# EAGLE board AlteraMAX3000ACPLDbreakout-v1 (EAGLE 5.11)
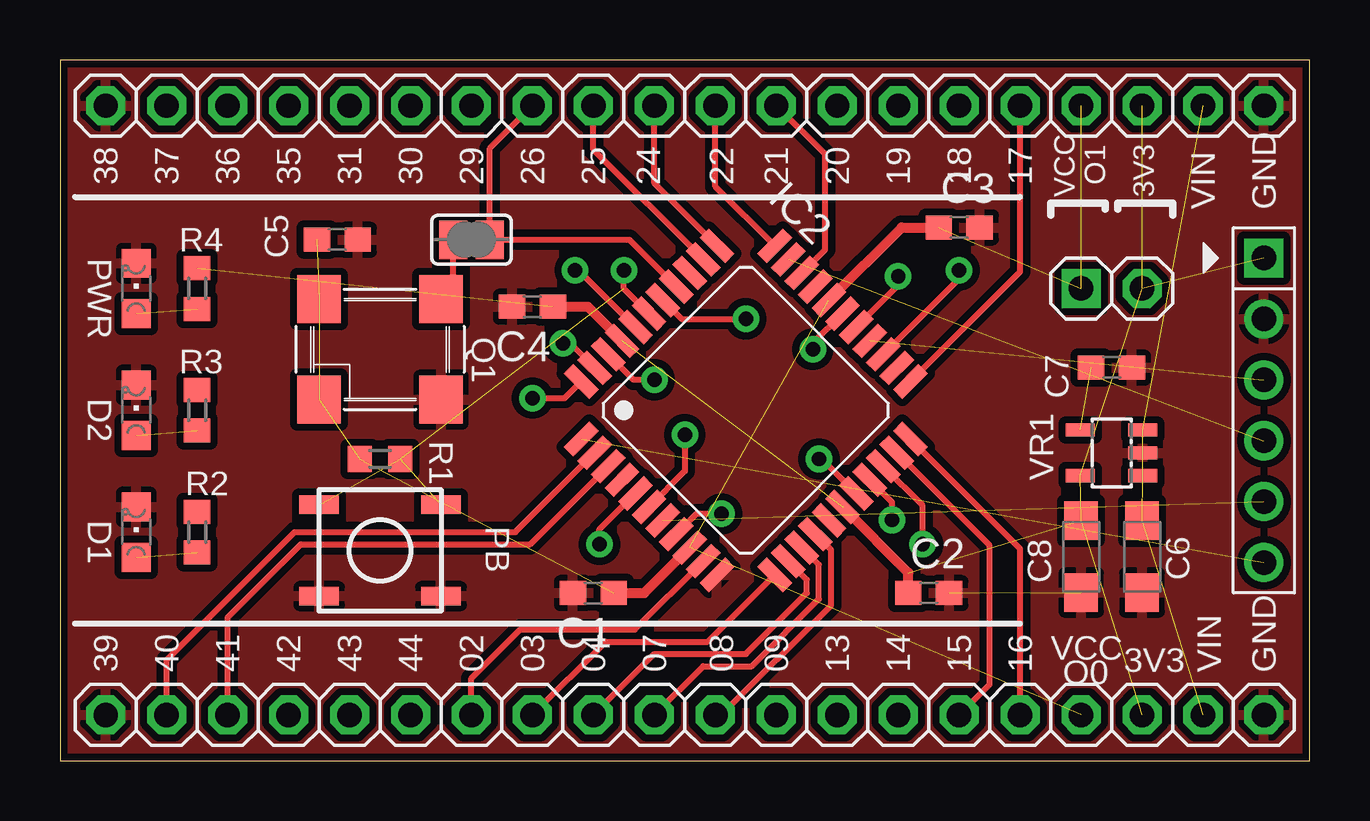
[diagram p0: board, top side]
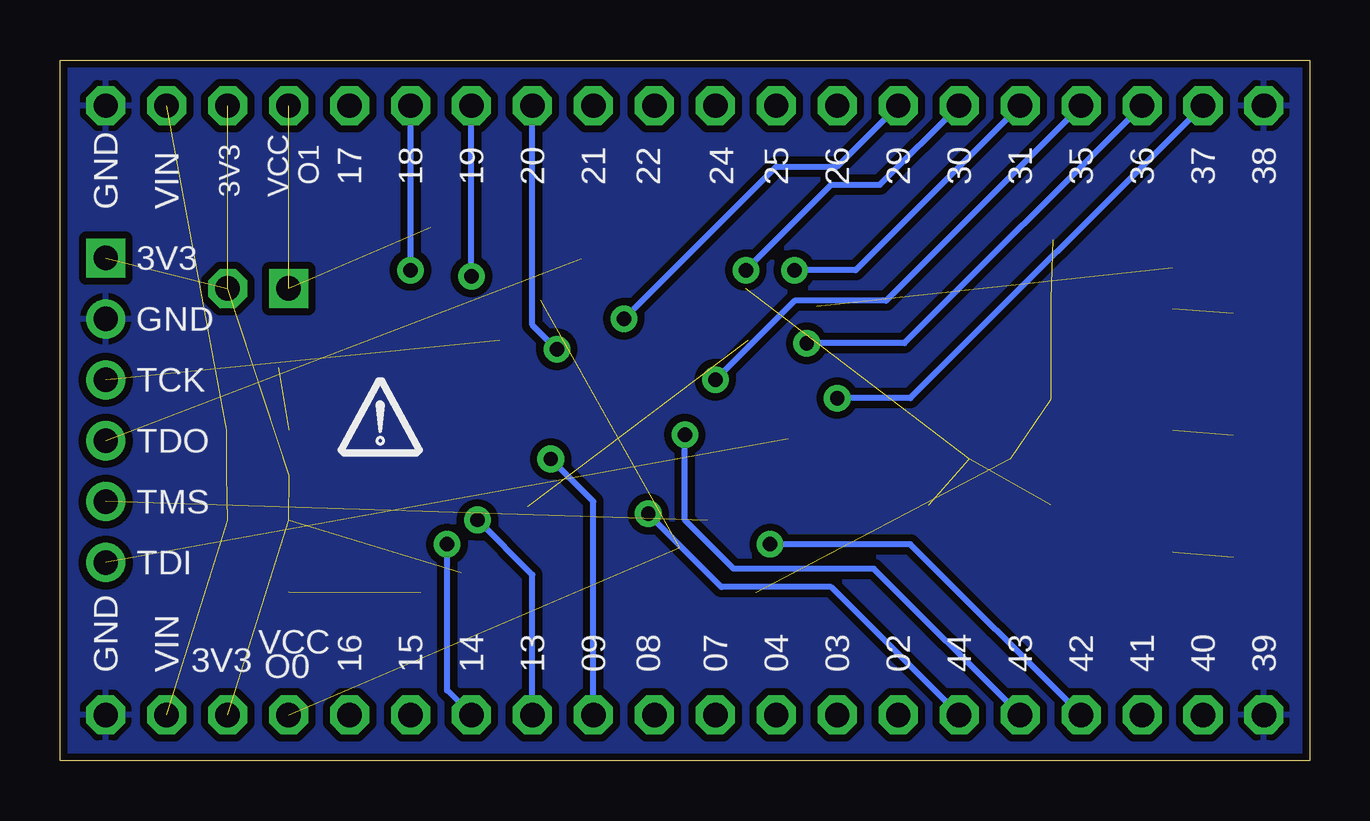
[diagram p1: board, bottom side, seen from below]

Size 52.07 x 29.21 mm. Coordinates in mm from the lower left corner, seen from the top.
Outline: 0,0 52.07,0 52.07,29.21 0,29.21 0,0
Copper layers (1*16): Top 0.035mm / dielectric 1.5mm / Bottom 0.035mm
Design rules "SparkFun": minimum track width 8mil, minimum drill 20mil, track to track 8mil, track to pad 8mil, pad to pad 8mil, via to via 8mil, smd to smd 8mil, copper to edge 10mil, drill to drill 8mil, minimum pad ring 12mil, minimum via ring 10mil, stop-mask expansion 4mil, vias tented up to drill 25mil, thermal gap 10mil

## Footprints (pad centres in the part's own frame; a part is rotated, then mirrored left to right if it is on the bottom)
C603 = smd 1.1 x 1: 1 -0.85,0; 2 0.85,0
SMC_A = smd 1.6 x 1.4: + -1.5,0; - 1.5,0
HEADER_PRG_1X06 = drill 1.016 square: 1 -6.35,0 | drill 1.016 round: 2 -3.81,0; 3 -1.27,0; 4 1.27,0; 5 3.81,0; 6 6.35,0
LED-805 = smd 1.2 x 1.2: A 0,-1.05; C 0,1.05
TQFP44 = smd 0.55 x 1.5: P1 -4,-5.7; P2 -3.2,-5.7; P3 -2.4,-5.7; P4 -1.6,-5.7; P5 -0.8,-5.7; P6 0,-5.7; P7 0.8,-5.7; P8 1.6,-5.7; P9 2.4,-5.7; P10 3.2,-5.7; P11 4,-5.7; P23 4,5.7; P24 3.2,5.7; P25 2.4,5.7; P26 1.6,5.7; P27 0.8,5.7; P28 0,5.7; P29 -0.8,5.7; P30 -1.6,5.7; P31 -2.4,5.7; P32 -3.2,5.7; P33 -4,5.7 | smd 1.5 x 0.55: P12 5.7,-4; P13 5.7,-3.2; P14 5.7,-2.4; P15 5.7,-1.6; P16 5.7,-0.8; P17 5.7,0; P18 5.7,0.8; P19 5.7,1.6; P20 5.7,2.4; P21 5.7,3.2; P22 5.7,4; P34 -5.7,4; P35 -5.7,3.2; P36 -5.7,2.4; P37 -5.7,1.6; P38 -5.7,0.8; P39 -5.7,0; P40 -5.7,-0.8; P41 -5.7,-1.6; P42 -5.7,-2.4; P43 -5.7,-3.2; P44 -5.7,-4
1X20 = drill 1.016 octagon: 1 -24.13,0; 2 -21.59,0; 3 -19.05,0; 4 -16.51,0; 5 -13.97,0; 6 -11.43,0; 7 -8.89,0; 8 -6.35,0; 9 -3.81,0; 10 -1.27,0; 11 1.27,0; 12 3.81,0; 13 6.35,0; 14 8.89,0; 15 11.43,0; 16 13.97,0; 17 16.51,0; 18 19.05,0; 19 21.59,0; 20 24.13,0
1X02-S = drill 1.016 square: 1 -1.27,0 | drill 1.016 octagon: 2 1.27,0
TACT_SWITCH_SMALL = smd 1.651 x 0.762: 1 -2.54,1.905; 2 2.54,1.905; 3 -2.54,-1.905; 4 2.54,-1.905
OSCILLATOR_7X5_SMD = smd 1.8 x 2: 1 -2.54,-2.1; 2 2.54,-2.1; 3 2.54,2.1; 4 -2.54,2.1
R603 = smd 1 x 1.1: 1 -0.85,0; 2 0.85,0
SJ = smd 1.168 x 1.6: 1 -0.762,0; 2 0.762,0
SOT-23-5 = smd 0.55 x 1.2: 1 -0.95,-1.3; 2 0,-1.3; 3 0.95,-1.3; 4 0.95,1.3; 5 -0.95,1.3

## Placement (x,y rotation side)
C1  0.1uF  [C603]  22.22,6.99 180 top
C2  0.1uF  [C603]  36.2,6.99 0 top
C3  0.1uF  [C603]  37.47,22.22 0 top
C4  0.1uF  [C603]  19.68,18.92 180 top
C5  0.1uF  [C603]  11.56,21.72 0 top
C6  3.3uF  [SMC_A]  45.09,8.51 270 top
C7  470pF  [C603]  43.82,16.38 0 top
C8  3.3uF  [SMC_A]  42.55,8.51 270 top
CON1  HEADER_PRG_XILINX_JTAG6  [HEADER_PRG_1X06]  50.16,14.61 270 top
D1  Yellow LED  [LED-805]  3.17,9.53 0 top
D2  Yellow LED  [LED-805]  3.17,14.61 0 top
IC2  EPM3064A-TQFP44  [TQFP44]  28.57,14.61 315 top
IO1  [1X20]  26.04,27.3 0 top
IO2  [1X20]  26.04,1.91 0 top
JP1  [1X02-S]  43.82,19.68 0 top
PB  SMD button small  [TACT_SWITCH_SMALL]  13.34,8.76 180 top
PWR  Yellow LED  [LED-805]  3.17,19.68 0 top
Q1  OSC-OSCILLATOR  [OSCILLATOR_7X5_SMD]  13.34,17.14 0 top
R1  10K  [R603]  13.34,12.57 180 top
R2  2K  [R603]  5.71,9.53 90 top
R3  2K  [R603]  5.71,14.61 90 top
R4  2K  [R603]  5.71,19.68 90 top
SJ1  [SJ]  17.14,21.72 0 top
U$1  DP_LOGO  [DP_LOGO]  38.73,13.34 0 bottom
VR1  3.3 VREG  [SOT-23-5]  43.82,12.83 90 top

## Library data of the parts
C1-C8 CON1 D1 D2 IC2 PB PWR Q1 R1-R4 VR1 = dp_devices
IO1 IO2 = pinhead
JP1 = pinhead-2
SJ1 = jumper
U$1 = dp_devices; FF1: fullfillment by; FF2: Seeed studio; FF3: www.seeedstudio.com; LICENSE: CC-BY-SA MAY 2011; PROJECT: Altera MAX3000A CPLD DEV BOARD v1.0; URL1: http://; URL2: DangerousPrototypes.com

## Nets
2: IC2.P2 IO2.2
3: IC2.P3 IO2.3
5: IC2.P5 IO2.4
6: IC2.P6 IO2.5
8: IC2.P8 IO2.6
10: IC2.P10 IO2.7
12: IC2.P12 IO2.8
13: IC2.P13 IO2.9
14: IC2.P14 IO2.10
15: IC2.P15 IO2.11
18: IC2.P18 IO2.12
19: IC2.P19 IO2.13
20: IC2.P20 IO2.14
21: IC2.P21 IO2.15
22: IC2.P22 IO2.16
23: IC2.P23 IO1.16
25: IC2.P25 IO1.15
27: IC2.P27 IO1.14
28: IC2.P28 IO1.13
31: IC2.P31 IO1.12
33: IC2.P33 IO1.11
34: IC2.P34 IO1.10
35: IC2.P35 IO1.9
37: IC2.P37 IO1.8 SJ1.2
38: IC2.P38 IO1.7
39: IC2.P39 IO1.6 PB.3 PB.4 R1.1
40: IC2.P40 IO1.5
42: IC2.P42 IO1.4
43: IC2.P43 IO1.3
44: IC2.P44 IO1.2
+3V3: C2.1 C4.1 C8.+ CON1.1 IC2.P17 IC2.P41 IO1.18 IO2.18 JP1.2 R4.2 VR1.5
GND: C1.2 C2.2 C3.2 C4.2 C5.2 C6.- C7.2 C8.- CON1.2 D1.C D2.C IC2.P4 IC2.P11 IC2.P16 IC2.P24 IC2.P30 IC2.P36 IO1.1 IO1.20 IO2.1 IO2.20 PB.1 PB.2 PWR.C Q1.2 VR1.2
JTAG_TCK: CON1.3 IC2.P26
JTAG_TDI: CON1.6 IC2.P1
JTAG_TDO: CON1.4 IC2.P32
JTAG_TMS: CON1.5 IC2.P7
N$1: D1.A R2.1
N$2: D2.A R3.1
N$3: PWR.A R4.1
N$5: Q1.3 SJ1.1
N$6: R2.2
N$7: C7.1 VR1.4
N$8: R3.2
VCCIO: C1.1 C3.1 C5.1 IC2.P9 IC2.P29 IO1.17 IO2.17 JP1.1 Q1.1 Q1.4 R1.2
VIN: C6.+ IO1.19 IO2.19 VR1.1 VR1.3

## Tracks (layer width: path | path; a pad name or v marks a point on that pad's centre or on a via)
2
  Top 0.254: IC2.P2 18.97,9.53 9.78,9.53 4.45,4.19 IO2.2
3
  Top 0.254: IC2.P3 19.59,9.02 10.03,9.02 6.99,5.97 IO2.3
5  (via drill 0.6)
  Top 0.254: IC2.P5 22.48,9.64 v22.48,9.02
  Bottom 0.254: v22.48,9.02 16.64,9.02 IO2.4
6  (via drill 0.6)
  Top 0.254: v26.04,13.59 26.04,12.06 IC2.P6
  Bottom 0.254: v26.04,13.59 26.04,10.03 24,8 18.16,8 IO2.5
8  (via drill 0.6)
  Top 0.254: IC2.P8 26.52,10.29 v27.56,10.29
  Bottom 0.254: v27.56,10.29 24.51,7.24 19.94,7.24 IO2.6
10
  Top 0.254: IC2.P10 23.96,5.46 19.18,5.46 17.14,3.43 IO2.7
12
  Top 0.254: IC2.P12 26.98,4.95 22.73,4.95 IO2.8
13
  Top 0.254: IC2.P13 31.11,7.54 31.11,6.99 28.57,4.45 24.76,4.45 IO2.9
14
  Top 0.254: IC2.P14 31.62,8.16 31.62,6.73 28.83,3.94 26.8,3.94 IO2.10
15
  Top 0.254: IC2.P15 32.13,8.79 32.13,6.48 27.56,1.91 IO2.11
18  (via drill 0.6)
  Top 0.254: IC2.P18 31.74,12.57 v31.62,12.57
  Bottom 0.254: v31.62,12.57 29.84,10.79 IO2.12
19  (via drill 0.6)
  Top 0.254: IC2.P19 34.67,10.77 v34.67,10.03
  Bottom 0.254: v34.67,10.03 32.39,7.75 IO2.13
20  (via drill 0.6)
  Top 0.254: IC2.P20 35.94,10.63 v35.94,9.02
  Bottom 0.254: v35.94,9.02 35.94,2.92 IO2.14
21
  Top 0.254: IC2.P21 38.73,8.97 38.73,3.17 IO2.15
22
  Top 0.254: IC2.P22 40.01,8.83 IO2.16
23
  Top 0.254: IC2.P23 40.01,20.38 IO1.16
25  (via drill 0.6)
  Top 0.254: IC2.P25 37.47,20.1 v37.47,20.45
  Bottom 0.254: v37.47,20.45 IO1.15
27  (via drill 0.6)
  Top 0.254: IC2.P27 34.93,19.82 v34.93,20.19
  Bottom 0.254: v34.93,20.19 IO1.14
28  (via drill 0.6)
  Top 0.254: IC2.P28 31.37,17.4 v31.37,17.14
  Bottom 0.254: v31.37,17.14 32.39,18.16 IO1.13
31
  Top 0.254: IC2.P31 31.88,21.3 31.88,25.27 IO1.12
33
  Top 0.254: IC2.P33 27.3,23.94 IO1.11
34
  Top 0.254: IC2.P34 24.76,24.07 IO1.10
35
  Top 0.254: IC2.P35 22.22,25.48 IO1.9
37
  Top 0.254: IC2.P37 23.73,21.72 SJ1.2 17.91,25.53 IO1.8
38  (via drill 0.6)
  Top 0.254: IC2.P38 25.9,18.41 v28.57,18.41
  Bottom 0.254: v28.57,18.41 22.22,24.76 19.68,24.76 IO1.7
39  (via drill 0.6)  (3 unrouted)
  Top 0.254: IC2.P39 23.49,19.68 v23.49,20.45
  Bottom 0.254: v23.49,20.45 19.94,24 17.91,24 IO1.6
40  (via drill 0.6)
  Top 0.254: IC2.P40 21.6,20.45 v21.46,20.45
  Bottom 0.254: v21.46,20.45 18.92,20.45 IO1.5
42  (via drill 0.6)
  Top 0.254: IC2.P42 23.91,15.88 v24.76,15.88
  Bottom 0.254: v24.76,15.88 21.46,19.18 17.65,19.18 IO1.4
43  (via drill 0.6)
  Top 0.254: IC2.P43 21.25,17.4 v20.95,17.4
  Bottom 0.254: v20.95,17.4 16.89,17.4 IO1.3
44  (via drill 0.6)
  Top 0.254: IC2.P44 21.02,15.11 v19.68,15.11
  Bottom 0.254: v19.68,15.11 16.64,15.11 IO1.2
+3V3  (8 unrouted)
  Top 0.406: C2.1 35.34,7.84 IC2.P17 | C4.1 21.99,18.92 IC2.P41
GND  (1 unrouted)
  pour Bottom (isolate 0.305): -0.64,-0.64 52.71,-0.64 52.71,29.84 -0.64,29.84
  pour Top (isolate 0.305): -0.64,-0.64 52.71,-0.64 52.71,29.84 -0.64,29.84
JTAG_TCK  (1 unrouted)
JTAG_TDI  (1 unrouted)
JTAG_TDO  (1 unrouted)
JTAG_TMS  (1 unrouted)
N$1  (1 unrouted)
N$2  (1 unrouted)
N$3  (1 unrouted)
N$5
  Top 0.254: SJ1.1 16.38,19.75 Q1.3
N$7  (1 unrouted)
VCCIO  (8 unrouted)
  Top 0.406: C1.1 24.35,6.99 IC2.P9 | C3.1 35.06,22.22 IC2.P29
VIN  (4 unrouted)

## Text on the board
tNames: 38 | 37 | 36 | 35 | 31 | 30 | 29 | 26 | 25 | 24 | 22 | 21 | 20 | 19 | 18 | 17 | O1 | VCC | 3V3 | VIN | GND | VCC | 3V3 | 39 | 40 | 41 | 42 | 43 | 44 | 02 | 03 | 04 | 07 | 08 | 09 | 13 | 14 | 15 | 16 | O0 | VIN | GND
bNames: 38 | 37 | 36 | 35 | 31 | 30 | 29 | 26 | 25 | 24 | 22 | 21 | 20 | 19 | 18 | 17 | O1 | VCC | 3V3 | VIN | GND | 3V3 | GND | TCK | TDO | TMS | TDI | VCC | 39 | 40 | 41 | 42 | 43 | 44 | 02 | 03 | 04 | 07 | 08 | 09 | 13 | 14 | 15 | 16 | O0 | 3V3 | VIN | GND